# Altium PCB PCB1.PcbDoc
Units mm, origin at the board's own origin, x right, y up, seen from the top; angles counter-clockwise.
Board outline 87.63 x 39.12 mm, 2 copper layers (Top Layer, Bottom Layer); 19 components, 16 nets, 50 pads, 0 vias.
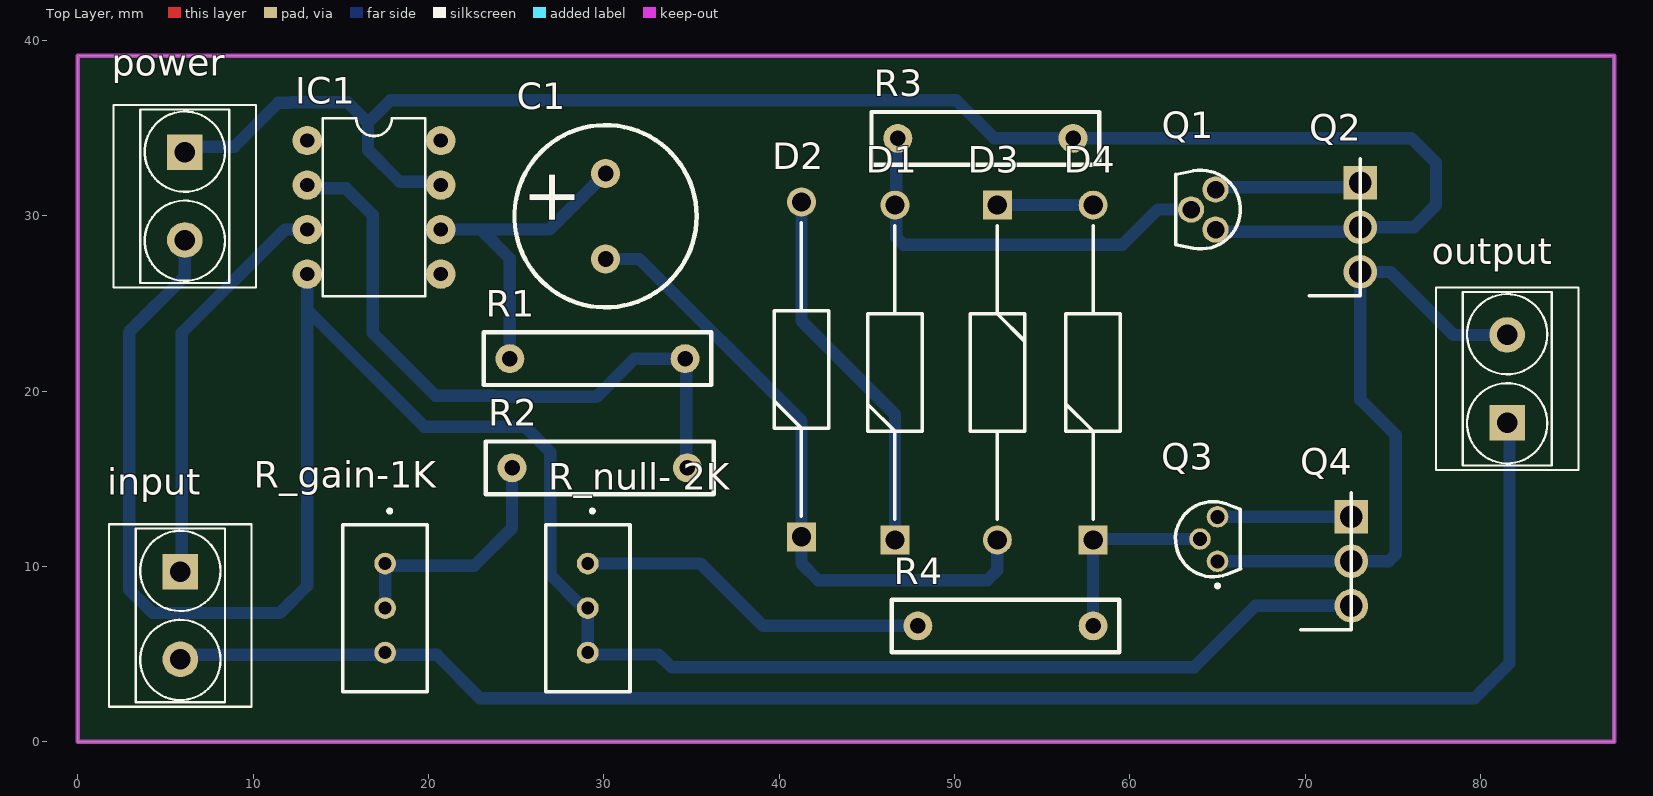
[diagram p0: Top Layer view]
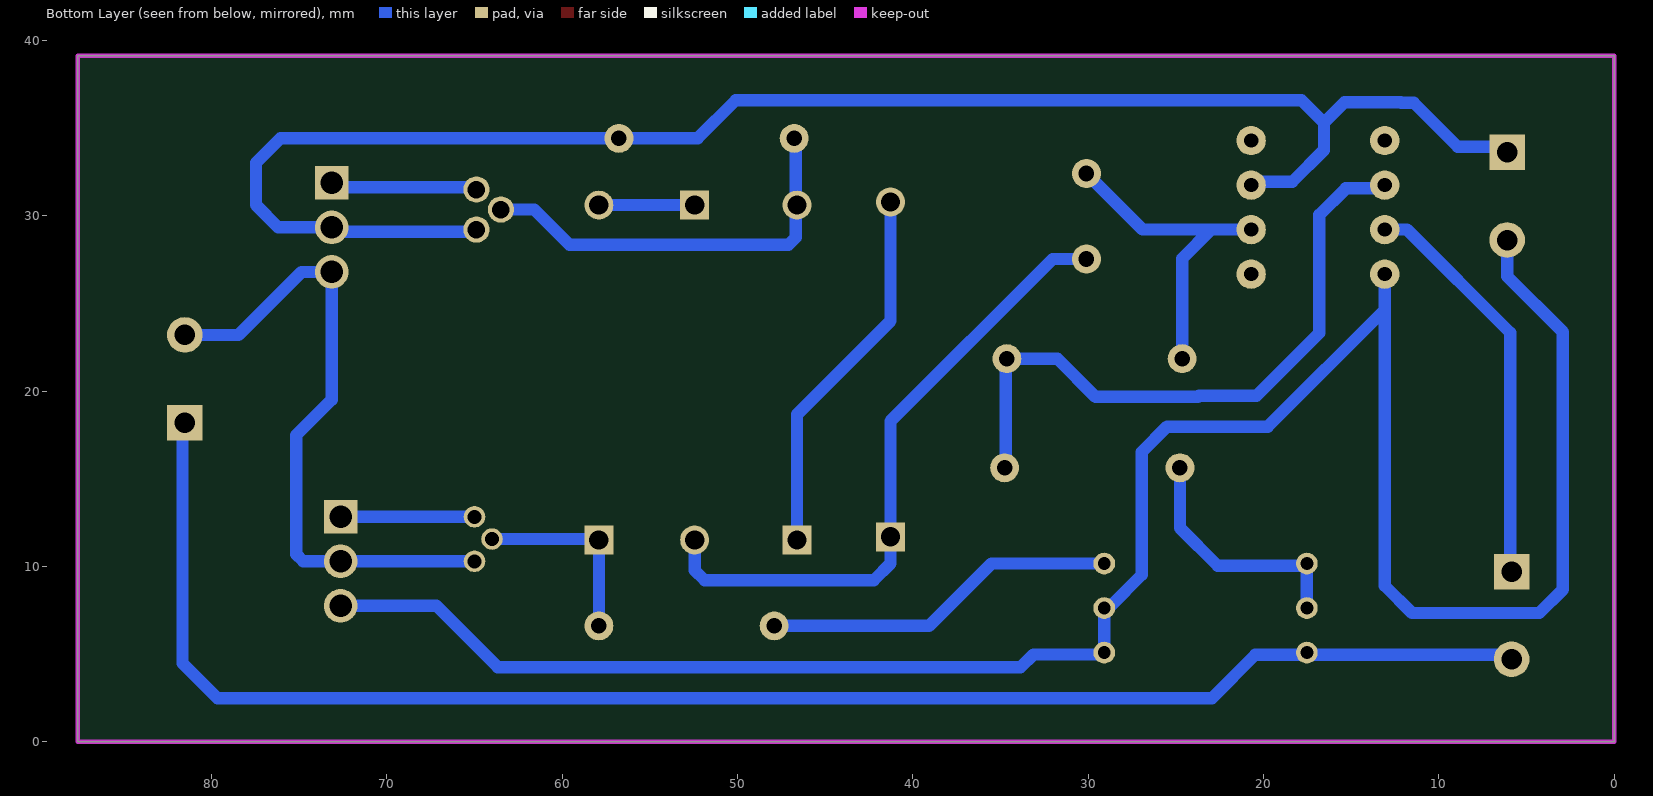
[diagram p1: Bottom Layer view, seen from below]
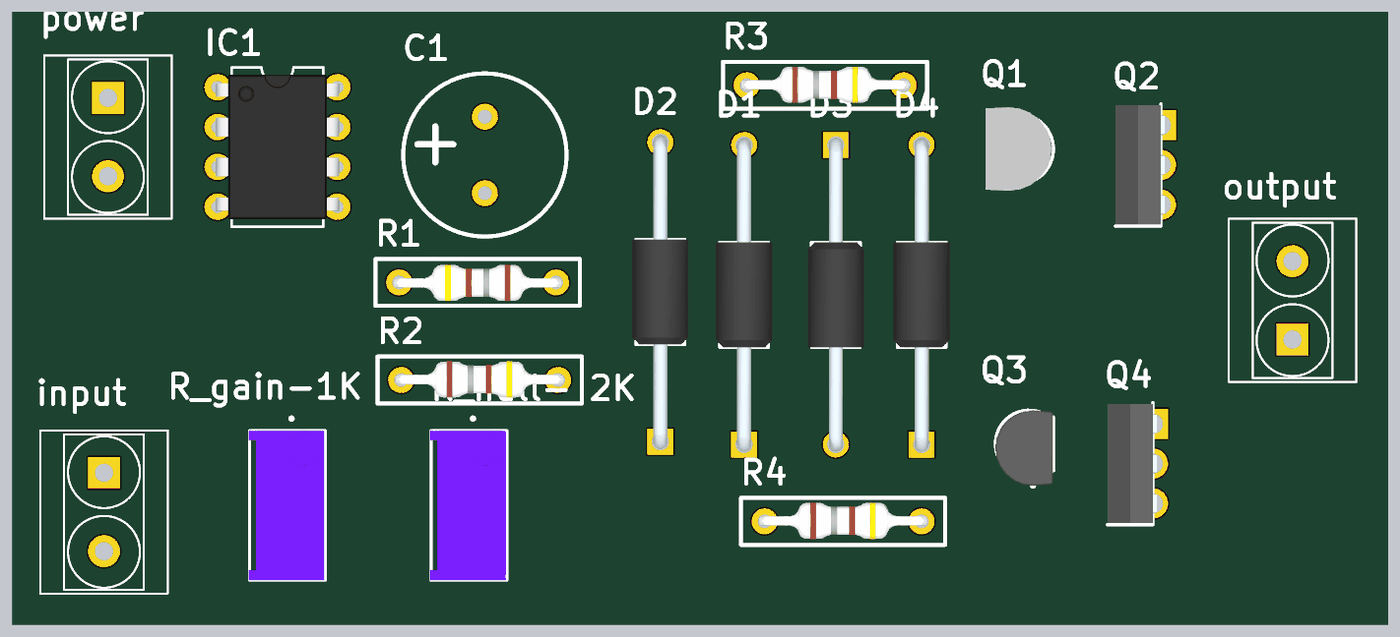
[diagram p2: 3D render of the assembled board from above, using the file's embedded part models]

## Layer stack, top to bottom
Top Solder: solder mask 0.0102, Solder Resist, Dk 3.5
Top Layer: signal copper 0.0356
Dielectric 1: dielectric 0.32, FR-4, Dk 4.8
Bottom Layer: signal copper 0.0356
Bottom Solder: solder mask 0.0102, Solder Resist, Dk 3.5

## Board outline
0,0 0,39.116 87.63,39.116 87.63,0

## Design rules (kind name [scope] priority, off if disabled: settings)
Clearance Clearance_3 [OnLayer('Keep-Out Layer')] p1: gap=2 ignorepadtopadclearanceinfootprint=TRUE
Clearance Clearance_2 [HasFootprint('LM431ACZ')] p2: gap=0.01 ignorepadtopadclearanceinfootprint=TRUE
Clearance [HasFootprint('2N5457')] p3: gap=0.01 ignorepadtopadclearanceinfootprint=TRUE
Clearance Clearance_1 [All] p4: gap=1 ignorepadtopadclearanceinfootprint=TRUE
ComponentClearance [All] p1: gap=1 collisioncheckmode=3 verticalgap=1 showdistances=FALSE
PolygonConnect [All] p1: connectstyle=Relief reliefconductorwidth=0.254 reliefentries=4 polygonreliefangle="90 Angle" airgapwidth=0.254
RoutingLayers [All] p1: top layer_v5=FALSE bottom layer_v5=TRUE
RoutingVias [All] p1: holewidth=0.711 width=1.27 viastyle="Through Hole" minholewidth=0.711 minwidth=1.27 maxholewidth=0.711 maxwidth=1.27
SolderMaskExpansion [All] p1: expansion=0.102 istentingtop=FALSE
Width [All] p1: maxlimit=0.7 minlimit=0.7 preferedwidth=0.7
28 further rules are at their usual default settings.

## Components (designator, comment, footprint, x,y, rotation, side; value= is the part's Value field where it differs from the comment)
C1 "100uf" "CAP TH" 30.099,31.242 r270 top
D1 "FR207" DIOAD1910W90L670D310 46.609,11.507 r90 top
D2 "FR207" DIOAD1910W90L670D310 41.275,11.684 r90 top
D3 "FR207" DIOAD1910W90L670D310 52.451,30.607 r270 top
D4 "FR207" DIOAD1910W90L670D310 57.912,11.507 r90 top
IC1 "OPAMP 741" DIL08-ROUND 16.891,30.48 r270 top
input "320110031" H2-5.0-10.5X8.0MM 5.842,7.199 r0 top
output "320110031" H2-5.0-10.5X8.0MM 81.534,20.701 r180 top
power "320110031" H2-5.0-10.5X8.0MM 6.096,31.115 r0 top
Q1 "2N3904_1" LM431ACZ 63.627,31.623 r270 top
Q2 "BD135" TO254P290X760X1320-3P 73.152,31.877 r270 top
Q3 "2N3906" 2N5457 65.008,10.287 r90 top
Q4 "BD135" TO254P290X760X1320-3P 72.644,12.827 r270 top
R1 "150k" "Res 1/4w" 34.638,21.844 r180 top
R2 "1k" "Res 1/4w" 24.765,15.621 r0 top
R3 "10k" "Res 1/4w" 46.769,34.417 r0 top
R4 "9.1k" "Res 1/4w" 47.912,6.604 r0 top
R_gain-1K "3296W-1-203LF" 3296W-1 17.526,7.62 r270 top
"R_null- 2K" "3296W-1-203LF" 3296W-1 29.083,7.62 r270 top

## Footprints (in the part's own frame and the unit in brackets; to place one, negate y for a bottom-side part, rotate by r counter-clockwise, add the part's x,y. Pads: shape width x height; smd on the part's side, far side on the other; paste and mask are expansions set on the pad)
2N5457 [mm]
  round 1.23 hole 0.8: 1(0,0) 2(1.27,1) 3(2.54,0)
  silkscreen extent -1.5,-1.33 3.41,2.4, body extent -1.41,-1.27 3.41,2.41, height 8.67
3296W-1 [mm]
  round 1.24 hole 0.74: 1(-2.54,0) 2(0,0) 3(2.54,0)
  silkscreen extent -5.64,-2.41 4.76,2.41, body extent -4.78,-2.48 4.78,2.35, height 11.55
"CAP TH" [mil]
  round 65 hole 35: 1(-46,0) 2(146,0)
  silkscreen extent -155,-205 255,205, body extent -151,-200 251,202, height 525
DIL08-ROUND [mil]
  round 66 hole 32: 1(-150,-150) 2(-50,-150) 3(50,-150) 4(150,-150) 5(150,150) 6(50,150) 7(-50,150) 8(-150,150)
  silkscreen extent -200,-115 200,115, body extent -181,-155 181,155, height 152
DIOAD1910W90L670D310 [mm]
  rect 1.65x1.65 hole 1.1: 1(0,0)
  round 1.65 hole 1.1: 2(19.1,0)
  silkscreen extent 1.17,-1.55 17.93,1.55, body extent -0.45,-1.8 19.55,1.8, height 3.59
H2-5.0-10.5X8.0MM [mil]
  rect 80x80 hole 46: 1(0,98.43)
  round 80 hole 46: 2(0,-98.43)
  silkscreen extent -160,-205 160,205, body extent -174,-197 180,221, height 496
LM431ACZ [mm]
  round 1.5 hole 1: 1(0.127,1.27) 2(1.27,-0.127) 3(2.413,1.27)
  silkscreen extent -0.97,-1 3.51,2.68, body extent -1.39,-1.64 3.93,2.55, height 6.11
"Res 1/4w" [mil]
  round 65 hole 35: 1(0,0) 2(393.7,0)
  silkscreen extent -59,-59 453,59, body extent -15,-44 409,47, height 155
TO254P290X760X1320-3P [mm]
  rect 1.92x1.92 hole 1.28: 1(0,0)
  round 1.92 hole 1.28: 2(2.54,0) 3(5.08,0)
  silkscreen extent -1.36,-2.9 6.44,0, body extent -1.26,-2.9 6.34,0.26, height 12.92

## Part data
C1: library part "CAP THT"
D1 D2 D3 D4: "Diode", Manufacturer_Name=Rectron, Arrow Part Number=FR207, Arrow Price/Stock=https://www.arrow.com/en/products/fr207/rectron?region=nac, Datasheet Link=https://www.arrow.com/en/products/fr207/rectron, Manufacturer_Part_Number=FR207
input output power: library part SCREW-TERMINAL-GREEN(2P-5.0)
Q1: "Transistor BJT NPN", Arrow Part Number=2N3904BU, Manufacturer_Name=onsemi, Mouser Part Number=512-2N3904BU, Arrow Price/Stock=https://www.arrow.com/en/products/2n3904bu/on-semiconductor?region=europe, Datasheet Link=http://www.onsemi.com/pub/Collateral/2N3904-D.pdf, Height=5.33mm, Manufacturer_Part_Number=2N3904BU, Mouser Price/Stock=https://www.mouser.co.uk/ProductDetail/onsemi-Fairchild/2N3904BU?qs=or4AE2qAS%252Bd0Jdpn%2F8ktKg%3D%3D
Q2 Q4: "Integrated Circuit", Manufacturer_Name=STMicroelectronics, Mouser Part Number=511-BD135, Arrow Part Number=BD135, Arrow Price/Stock=https://www.arrow.com/en/products/bd135/stmicroelectronics?region=nac, Datasheet Link=http://www.st.com/web/en/resource/technical/document/datasheet/CD00001225.pdf, Height=2.9mm, Manufacturer_Part_Number=BD135, Mouser Price/Stock=https://www.mouser.co.uk/ProductDetail/STMicroelectronics/BD135?qs=DcAdhm6iCnquzRqyLiHtjA%3D%3D
Q3: "Transistor BJT PNP", Manufacturer_Name="Central Semiconductor", Mouser Part Number=610-2N3906, Datasheet Link=http://www.mouser.com/datasheet/2/68/2n3905-29545.pdf, Height=5.33mm, Manufacturer_Part_Number=2N3906, Mouser Price/Stock=https://www.mouser.com/Search/Refine.aspx?Keyword=610-2N3906
R1 R2 R3 R4: library part RES_THT
R_gain-1K "R_null- 2K": "Resistor", Manufacturer_Name=Bourns, Mouser Part Number=652-3296W-1-203LF, Arrow Part Number=3296W-1-203LF, Arrow Price/Stock=https://www.arrow.com/en/products/3296w-1-203lf/bourns?region=europe, Datasheet Link=http://www.bourns.com/docs/Product-Datasheets/3296.pdf, Manufacturer_Part_Number=3296W-1-203LF, Mouser Price/Stock=https://www.mouser.co.uk/ProductDetail/Bourns/3296W-1-203LF?qs=UBppDQZA%252BGQoINFzp6sGqA%3D%3D

## Nets (pads, with @x,y where several pads share a name; then routed paths per layer and width w, separated by ;. In a path a pad name is that pad's centre, name@x,y a point inside that pad or via, vN(x,y) a via of type N, cw(c..) or ccw(c..) an arc to the next point about the centre after c; other vN are vias at no path point)
+15v: IC1.7 power.1 Q1.3 Q2.2 R3.2 | length 97.3
  Bottom Layer w0.7: power.1 6.421,33.94 8.921,33.94 11.43,36.449 12.145,36.449 12.175,36.478 15.378,36.478 16.55,35.306 ; IC1.7 20.514,31.937 18.355,31.937 16.55,33.742 16.55,35.306 ; Q1.3 65.024,29.083 72.568,29.083 72.822,29.337 76.2,29.337 77.47,30.607 77.47,33.02 76.073,34.417 R3.2 52.278,34.417 50.102,36.593 17.837,36.593 16.55,35.306
-15v: "R_null- 2K.2" "R_null- 2K.3" IC1.4 power.2 Q4.3 | length 125.1
  Bottom Layer w0.7: power.2 6.096,26.543 2.921,23.368 2.921,8.679 4.267,7.333 11.524,7.333 13.081,8.89 13.081,24.642 ; IC1.4 13.081,24.642 ; 29.083,5.329 29.083,7.62 28.98,7.723 28.734,7.723 26.941,9.516 26.941,16.522 25.494,17.968 19.754,17.968 13.081,24.642 ; 29.186,4.977 33.123,4.977 33.86,4.24 63.676,4.24 67.183,7.747 Q4.3
GND: input.2 output.1 R_gain-1K.3 | length 91.6
  Bottom Layer w0.7: input.2 6.096,4.953 17.526,4.953 20.466,4.953 22.942,2.477 79.664,2.477 81.661,4.474 81.661,18.074 output.1
NetC1_1: C1.1 IC1.6 R1.2 | length 18.8
  Bottom Layer w0.7: IC1.6 22.987,29.21 ; R1.2 24.638,27.559 22.987,29.21 ; C1.1 26.899,29.21 22.987,29.21
NetC1_2: C1.2 D2.1 D3.2 | length 36.7
  Bottom Layer w0.7: C1.2 32.025,27.534 41.275,18.284 41.275,10.16 42.23,9.205 51.877,9.205 52.451,9.779 D3.2
NetD1_1: D1.1 D2.2 | length 21.5
  Bottom Layer w0.7: D2.2 41.275,24.003 46.609,18.669 D1.1
NetD1_2: D1.2 Q1.2 R3.1 | length 23.6
  Bottom Layer w0.7: R3.1 46.689,34.337 46.689,30.687 D1.2 46.68,30.536 46.68,28.754 47.09,28.344 59.586,28.344 61.595,30.353 Q1.2
NetD3_1: D3.1 D4.2 | length 5.5
  Bottom Layer w0.7: D3.1 D4.2
NetD4_1: D4.1 Q3.2 R4.2 | length 11
  Bottom Layer w0.7: R4.2 D4.1 57.962,11.557 Q3.2
NetIC1_2: IC1.2 R1.1 R2.2 | length 37.7
  Bottom Layer w0.7: IC1.2 13.268,31.563 15.3,31.563 16.813,30.05 16.813,23.314 20.393,19.734 23.671,19.734 23.737,19.668 29.574,19.668 31.75,21.844 R1.1 34.702,21.78 34.702,15.684 R2.2
NetIC1_3: IC1.3 input.1 | length 23.3
  Bottom Layer w0.7: input.1 5.922,9.779 5.922,23.321 11.811,29.21 IC1.3
Netoutput_2: output.2 Q2.3 Q3.1 Q4.2 | length 36.8
  Bottom Layer w0.7: Q3.1@65.405,10.287 Q4.2 74.774,10.287 75.184,10.697 75.184,17.478 73.152,19.51 Q2.3 74.874,26.797 78.47,23.201 output.2
NetQ1_1: Q1.1 Q2.1 | length 8.4
  Bottom Layer w0.7: Q1.1 65.024,31.623 72.542,31.623 72.796,31.877 Q2.1
NetQ3_3: Q3.3 Q4.1 | length 7.4
  Bottom Layer w0.7: Q3.3@65.278,12.827 Q4.1
NetR2_1: R2.1 R_gain-1K.1 R_gain-1K.2 | length 14.1
  Bottom Layer w0.7: R_gain-1K.2@17.526,7.493 17.526,10.033 22.606,10.033 24.765,12.192 R2.1
NetR4_1: "R_null- 2K.1" R4.1 | length 20.3
  Bottom Layer w0.7: 29.083,10.16 35.521,10.16 39.077,6.604 R4.1
pads on no net: IC1.1 IC1.5 IC1.8

## Keep-outs
Keep-Out Layer:
  the board outline again, w0.254

## Text inside footprints (layer, text, board x,y; h text height)
C1: Top Overlay "+" at 25.781,32.766 h3 r270